# EAGLE board source_eagle (EAGLE 9.6.2)
REV: C
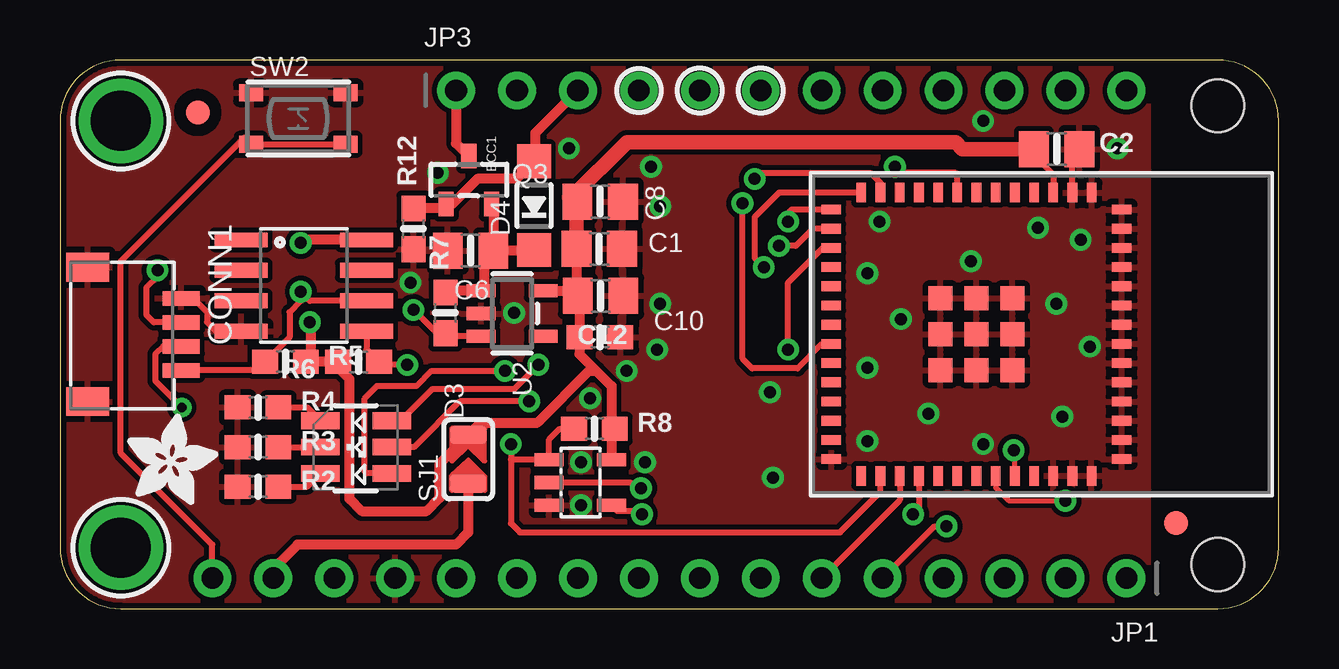
[diagram p0: board, top side]
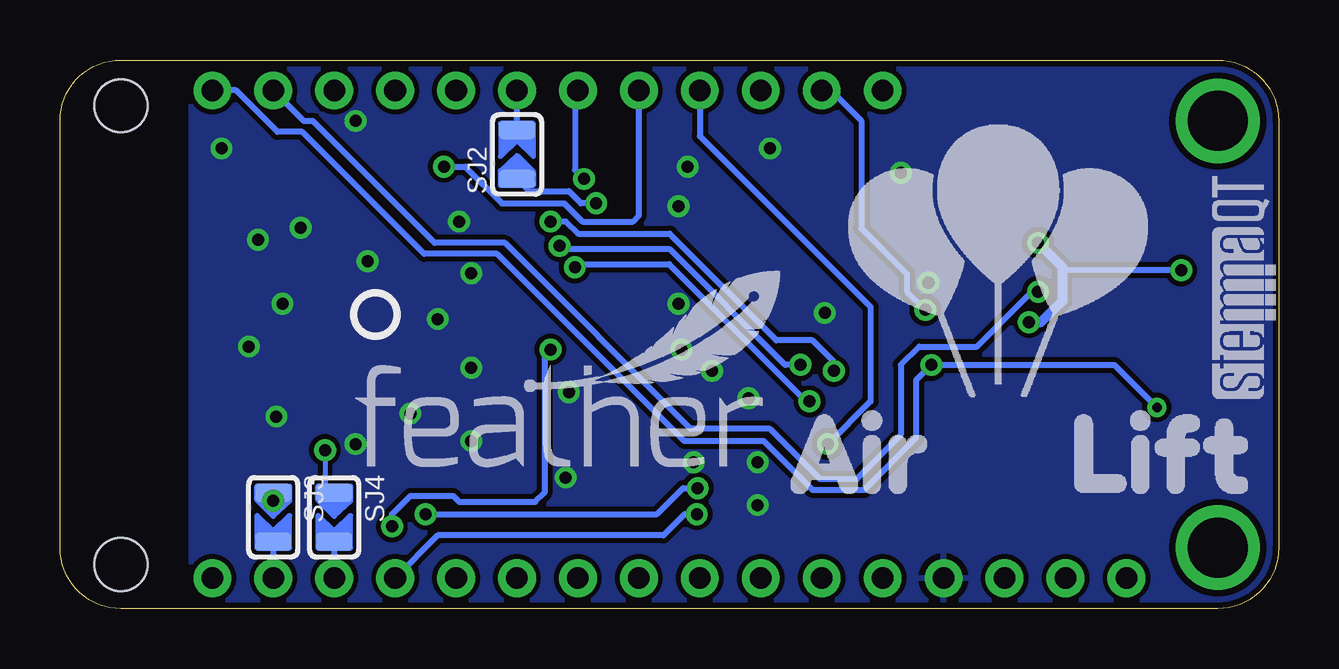
[diagram p1: board, bottom side, seen from below]

Size 50.8 x 22.86 mm. Coordinates in mm from the lower left corner, seen from the top.
Outline: 2.54,0 48.26,0 arc90 50.8,2.54 50.8,20.32 arc90 48.26,22.86 2.54,22.86 arc90 0,20.32 0,2.54 arc90 2.54,0
Copper layers (1*16): Top 0.035mm / dielectric 1.5mm / Bottom 0.035mm
Design rules "adafruit 7-7 *": minimum track width 6mil, minimum drill 15.5mil, track to track 8mil, track to pad 7mil, pad to pad 7mil, via to via 7mil, smd to smd 7mil, copper to edge 10mil, drill to drill 8mil, minimum pad ring 10mil, minimum via ring 8mil, stop-mask expansion 2mil, vias tented up to drill 20mil, thermal gap 10mil
Holes 2.2 mm at 48.26,1.84 48.26,20.95

## Footprints (pad centres in the part's own frame; a part is rotated, then mirrored left to right if it is on the bottom)
0805-NO = smd 1.24 x 1.5: 1 -0.95,0; 2 0.95,0
0603-NO = smd 1.075 x 1: 1 -0.85,0; 2 0.85,0
JST_SH4 = smd 0.6 x 1.55: 1 -1.5,2.006; 2 -0.5,2.006; 3 0.5,2.006; 4 1.5,2.006 | smd 1.2 x 1.8: MT1 -2.8,-1.894; MT2 2.8,-1.894
RGBLED_3535_PLCC6 = smd 0.7 x 1.6: 1 -1.1,-1.458; 2 0,-1.458; 3 1.1,-1.458; 4 1.1,1.508; 5 0,1.508; 6 -1.1,1.508
SOD-123 = smd 1.4 x 1.4: A 1.85,0; C -1.85,0
SOIC8 = smd 0.61 x 2.21: 1 -1.905,-2.616; 2 -0.635,-2.616; 3 0.635,-2.616; 4 1.905,-2.616; 5 1.905,2.616; 6 0.635,2.616; 7 -0.635,2.616; 8 -1.905,2.616
SOT23-5L = smd 0.55 x 1.2: 1 -0.95,-1.3; 2 0,-1.3; 3 0.95,-1.3; 4 0.95,1.3; 5 -0.95,1.3
1X16_ROUND_MIN = drill 0.9 pad 1.575: 1 -19.05,0; 2 -16.51,0; 3 -13.97,0; 4 -11.43,0; 5 -8.89,0; 6 -6.35,0; 7 -3.81,0; 8 -1.27,0; 9 1.27,0; 10 3.81,0; 11 6.35,0; 12 8.89,0; 13 11.43,0; 14 13.97,0; 15 16.51,0; 16 19.05,0
1X12_ROUND_MIN = drill 0.9 pad 1.575: 1 -13.97,0; 2 -11.43,0; 3 -8.89,0; 4 -6.35,0; 5 -3.81,0; 6 -1.27,0; 7 1.27,0; 8 3.81,0; 9 6.35,0; 10 8.89,0; 11 11.43,0; 12 13.97,0
SOT23-R = smd 0.635 x 1.016: 1 -0.95,-1; 2 0.95,-1; 3 0,1
SOLDERJUMPER_ARROW_NOPASTE = smd 0.762 x 1.524: 1 -1.016,0; 2 1.016,0
BTN_RKB2_4.6X2.8 = smd 1 x 0.7: A 1.973,1.075; A' -1.973,1.075; B 1.973,-1.075; B' -1.973,-1.075
SOT23-5 = smd 0.55 x 1.2: 1 -0.95,-1.3; 2 0,-1.3; 3 0.95,-1.3; 4 0.95,1.3; 5 -0.95,1.3
MOUNTINGHOLE_2.5_PLATED = drill 2.5 pad 3.2: P$1 0,0
FIDUCIAL_1MM = smd 1 x 1: 1 0,0
ESP32-MINI-1 = smd 0.813 x 0.406: 1 -5.9,4.9; 2 -5.9,4.1; 3 -5.9,3.3; 4 -5.9,2.5; 5 -5.9,1.7; 6 -5.9,0.9; 7 -5.9,0.1; 8 -5.9,-0.7; 9 -5.9,-1.5; 10 -5.9,-2.3; 11 -5.9,-3.1; 12 -5.9,-3.9; 13 -5.9,-4.7; 28 5.9,-4.7; 29 5.9,-3.9; 30 5.9,-3.1; 31 5.9,-2.3; 32 5.9,-1.5; 33 5.9,-0.7; 34 5.9,0.1; 35 5.9,0.9; 36 5.9,1.7; 37 5.9,2.5; 38 5.9,3.3; 39 5.9,4.1; 40 5.9,4.9 | smd 0.406 x 0.813: 14 -5.2,-5.95; 15 -4.4,-5.95; 16 -3.6,-5.95; 17 -2.8,-5.95; 18 -2,-5.95; 19 -1.2,-5.95; 20 -0.4,-5.95; 21 0.4,-5.95; 22 1.2,-5.95; 23 2,-5.95; 24 2.8,-5.95; 25 3.6,-5.95; 26 4.4,-5.95; 27 5.2,-5.95; 41 5.2,6.15; 42 4.4,6.15; 43 3.6,6.15; 44 2.8,6.15; 45 2,6.15; 46 1.2,6.15; 47 0.4,6.15; 48 -0.4,6.15; 49 -1.2,6.15; 50 -2,6.15; 51 -2.8,6.15; 52 -3.6,6.15; 53 -4.4,6.15; 54 -5.2,6.15 | smd 0.991 x 0.991: 55 -1.5,1.6; 56 0,1.6; 57 1.5,1.6; 58 -1.5,0.1; 59 0,0.1; 60 1.5,0.1; 61 -1.5,-1.4; 62 0,-1.4; 63 1.5,-1.4

## Placement (x,y rotation side)
C1  10uF  [0805-NO]  22.48,14.99 0 top
C2  10uF  [0805-NO]  41.54,19.15 0 top
C6  10uF  [0805-NO]  17.11,14.92 180 top
C8  10uF  [0805-NO]  22.51,16.96 0 top
C10  10uF  [0805-NO]  22.53,13.03 0 top
C12  0.1uF  [0603-NO]  22.5,11.3 0 top
CONN1  STEMMA_I2C_QT  [JST_SH4]  3.05,11.43 270 top
D3  RGB  [RGBLED_3535_PLCC6]  12.32,6.73 270 top
D4  MBR0520  [SOD-123]  19.76,16.79 90 top
ECC1  ATECCx08  [SOIC8]  10.16,13.46 270 top
IC2  74AHC1G125  [SOT23-5L]  21.69,5.26 270 top
JP1  [1X16_ROUND_MIN]  25.4,1.27 180 top
JP3  [1X12_ROUND_MIN]  30.48,21.59 0 top
PLABEL0  [PLABEL0]  21.72,20.07 0 top
PLABEL1  [PLABEL1]  6.35,2.92 0 top
PLABEL2  [PLABEL2]  9.02,2.79 0 top
PLABEL3  [PLABEL3]  19.18,2.79 0 top
PLABEL4  [PLABEL4]  16.76,2.79 0 top
PLABEL5  [PLABEL5]  31.75,2.92 0 top
PLABEL6  [PLABEL6]  34.29,3.3 90 top
PLABEL7  [PLABEL7]  36.83,3.05 90 top
PLABEL8  [PLABEL8]  39.37,3.3 90 top
PLABEL9  [PLABEL9]  41.91,3.05 90 top
PLABEL10  [PLABEL10]  16.51,20.07 0 top
PLABEL11  [PLABEL11]  14.1,2.79 0 top
PLABEL12  [PLABEL12]  19.05,20.07 0 top
PLABEL13  [PLABEL13]  9.96,18.11 0 top
PLABEL14  [PLABEL14]  21.69,2.74 0 top
PLABEL15  [PLABEL15]  41.85,20.32 0 top
PLABEL16  [PLABEL16]  45.28,19.68 90 top
PLABEL17  [PLABEL17]  24.23,2.77 0 top
PLABEL18  [PLABEL18]  27.81,11.3 90 top
PLABEL19  [PLABEL19]  18.8,6.22 90 top
PLABEL20  [PLABEL20]  9.7,16.59 0 top
PLABEL21  [PLABEL21]  41.91,5.59 90 bottom
PLABEL22  [PLABEL22]  39.37,5.71 90 bottom
PLABEL23  [PLABEL23]  34.29,2.29 90 bottom
PLABEL24  [PLABEL24]  36.83,2.29 90 bottom
PLABEL25  [PLABEL25]  31.75,2.29 90 bottom
PLABEL26  [PLABEL26]  15.37,2.79 0 bottom
PLABEL27  [PLABEL27]  31.62,16.89 270 bottom
PLABEL28  [PLABEL28]  24.13,20.57 270 bottom
PLABEL29  [PLABEL29]  29.21,20.57 270 bottom
PLABEL30  [PLABEL30]  26.67,20.57 270 bottom
PLABEL31  [PLABEL31]  19.05,20.57 270 bottom
PLABEL32  [PLABEL32]  21.46,20.57 270 bottom
PLABEL33  [PLABEL33]  44.45,20.45 270 bottom
PLABEL34  [PLABEL34]  41.91,20.45 270 bottom
Q3  AO3401  [SOT23-R]  17.04,17.86 0 top
R2  1K  [0603-NO]  8.26,5.08 0 top
R3  1K  [0603-NO]  8.26,6.73 0 top
R4  1K  [0603-NO]  8.26,8.38 0 top
R5  10K  [0603-NO]  9.4,10.29 0 top
R6  10K  [0603-NO]  12.45,10.29 180 top
R7  100K  [0603-NO]  16.07,12.32 90 top
R8  10K  [0603-NO]  22.28,7.49 0 top
R12  100K  [0603-NO]  14.73,15.82 90 top
SJ1  JUMPER  [SOLDERJUMPER_ARROW_NOPASTE]  17.02,6.22 90 top
SJ2  [SOLDERJUMPER_ARROW_NOPASTE]  31.75,18.92 90 bottom
SJ3  [SOLDERJUMPER_ARROW_NOPASTE]  41.91,3.81 270 bottom
SJ4  [SOLDERJUMPER_ARROW_NOPASTE]  39.37,3.81 270 bottom
SW2  RKB2  [BTN_RKB2_4.6X2.8]  9.93,20.42 0 top
U2  RT9080-3.3  [SOT23-5]  18.85,12.29 270 top
U$6  [AIRLIFT]  20.32,3.43 0 bottom
U$7  [FEATHERLOGO_MED]  38.61,5.84 0 bottom
U$12  [STEMMAQT]  0.13,8.76 90 bottom
U$13  [PCBFEAT-REV-040]  37.66,12.26 0 bottom
U$15  [ADAFRUIT_3.5MM]  2.79,4.32 0 top
U$31  MOUNTINGHOLE2.5  [MOUNTINGHOLE_2.5_PLATED]  2.54,20.32 270 top
U$32  MOUNTINGHOLE2.5  [MOUNTINGHOLE_2.5_PLATED]  2.54,2.54 270 top
U$34  FIDUCIAL_1MM  [FIDUCIAL_1MM]  5.74,20.68 270 top
U$35  FIDUCIAL_1MM  [FIDUCIAL_1MM]  46.53,3.56 270 top
X1  ESP32-MINI-1  [ESP32-MINI-1]  38.1,11.43 270 top

## Library data of the parts
C1 C2 C6 C10 C12 D3 D4 JP1 JP3 R2-R8 R12 U$13 U$15 = microbuilder
C8 = microbuilder; COMPANY: ADAFRUIT INDUSTRIES; DRAWN: KTOWN; REV: C
CONN1 = adafruit_electromech; LCSC: C2845363
ECC1 = cryptotronix
IC2 = adafruit; ROT: 270
PLABEL0 PLABEL1-PLABEL34 = pinguin
Q3 = microbuilder; ROT: 270
SJ1-SJ4 U$34 U$35 = microbuilder; BOM: EXCLUDE
SW2 = adafruit_electromech
U2 = adafruit_power; JLC_ROTATION: 0
U$6 U$7 U$12 = silks
U$31 U$32 = adafruit_electromech; BOM: EXCLUDE
X1 = adafruit_wireless

## Nets
3.3V: C1.1 C2.1 C8.1 C10.1 C12.1 CONN1.2 ECC1.8 IC2.5 R5.2 R6.2 R8.2 SJ1.2 U2.5 X1.3
A0: JP1.12
A1: JP1.11
A2: JP1.10
A3: JP1.9
A4: JP1.8
A5: JP1.7
BLUE: D3.6 X1.15
D5: JP3.10
D6: JP3.9
D9: JP3.8
EN: JP3.2 R7.1 U2.3
ESP_BUSY: JP3.6 X1.12
ESP_CS: IC2.1 JP3.4 R8.1 X1.29
ESP_GPIO0: SJ2.1 X1.21
ESP_MISO: IC2.2 X1.31
ESP_RESET: JP3.5 X1.8
ESP_RX: SJ3.1 X1.35
ESP_TX: SJ4.1 X1.36
GND: C1.2 C2.2 C6.2 C8.2 C10.2 C12.2 CONN1.1 CONN1.MT1 CONN1.MT2 ECC1.4 IC2.3 JP1.13 R2.1 R3.1 R4.1 R12.1 SW2.A SW2.A' U2.2 X1.1 X1.2 X1.27 X1.38 X1.39 X1.40 X1.41 X1.42 X1.43 X1.44 X1.45 X1.46 X1.47 X1.48 X1.49 X1.50 X1.51 X1.52 X1.53 X1.54 X1.55 X1.56 X1.57 X1.58 X1.59 X1.60 X1.61 X1.62 X1.63
GREEN: D3.5 X1.13
MISO: IC2.4 JP1.4
MOSI: JP1.5 X1.16
N$1: JP1.15 SJ1.1
N$2: D3.3 R2.2
N$3: D3.2 R3.2
N$4: D3.1 R4.2
N$5: JP3.7 SJ2.2
N$6: JP1.2 SJ3.2
N$7: C6.1 D4.C Q3.2 R7.2 U2.1
N$8: JP1.3 SJ4.2
NC: JP1.1
RED: D3.4 X1.14
RESET: JP1.16 SW2.B SW2.B'
SCK: JP1.6 X1.30
SCL: CONN1.4 ECC1.6 JP3.11 R5.1
SDA: CONN1.3 ECC1.5 JP3.12 R6.1
VBAT: JP3.1 Q3.3
VBUS: D4.A JP3.3 Q3.1 R12.2

## Tracks (layer width: path | path; a pad name or v marks a point on that pad's centre or on a via)
3.3V  (via drill 0.5)
  Top 0.254: R6.2 R5.2 | C2.1 40.59,18.9 41.4,18.09 X1.3 | R8.2 22.99,7.49 | CONN1.2 3.91,11.93 3.6,12.24 3.6,13.38 4.06,13.84 v4.06,14.1
  Top 0.406: 21.53,16.95 21.55,16.97 | U2.5 21.37,13.24 C10.1 | C1.1 21.53,13.08 C10.1 | C10.1 21.65,12.96 C12.1 21.65,10.6 22.35,9.91 | 22.35,9.91 22.06,9.91 19.9,7.75 17.53,7.75 SJ1.2 15.82,6.04 15.82,4.62 15.27,4.06 12.57,4.06 12.06,4.57 12.06,9.56 11.6,10.03 R6.2 10.45,10.29 10.45,11.9 v10.41,11.94 | ECC1.8 10.16,15.37 v10.03,15.24 | 22.35,9.91 22.99,9.27 22.99,7.49 IC2.5
  Top 0.61: C2.1 37.62,19.15 37.34,19.43 23.63,19.43 21.33,17.13 | C1.1 21.53,16.95
  Top 0.813: 21.33,17.13 21.55,16.97 C8.1
  Bottom 0.254: v4.06,14.1 9.02,14.1
  Bottom 0.406: v10.03,15.24 9.02,14.22 9.02,14.1 9.02,12.83 9.91,11.94 v10.41,11.94
BLUE  (via drill 0.5)
  Top 0.254: v19.94,10.16 18.92,9.14 15.52,9.14 14.21,7.83 D3.6 | X1.15 31.39,15.83 30.67,15.11 v29.97,15.11
  Bottom 0.254: v19.94,10.16 20.57,10.16 25.4,14.99 29.84,14.99 v29.97,15.11
EN  (via drill 0.5)
  Top 0.254: U2.3 16.19,11.34 R7.1 15.71,11.47 v14.73,12.45
  Bottom 0.254: JP3.2 18.67,21.59 17.4,20.32 17.4,15.85 15.49,13.94 15.49,13.21 v14.73,12.45
ESP_BUSY  (via drill 0.5)
  Top 0.254: v28.96,17.9 28.96,18.16 33.78,18.16 34.2,17.74 X1.12
  Bottom 0.254: JP3.6 29.34,21.46 29.34,18.28 v28.96,17.9
ESP_CS  (via drill 0.5)
  Top 0.254: v18.8,6.86 18.8,6.22 | 18.8,6.22 18.8,3.56 19.18,3.17 32.51,3.17 34.2,4.86 X1.29 | 18.8,6.22 18.81,6.21 IC2.1 20.39,7.06 20.83,7.49 R8.1
  Bottom 0.254: JP3.4 24.13,19.68 17.02,12.57 17.02,8.64 v18.8,6.86
ESP_GPIO0  (via drill 0.5)
  Top 0.254: X1.21 31.77,11.03 30.75,10.01 28.85,10.01 28.45,10.41 v28.45,16.89
  Bottom 0.254: v28.45,16.89 29.08,16.89 29.59,17.4 31.24,17.4 SJ2.1
ESP_MISO  (via drill 0.5)
  Top 0.254: IC2.2 23.78,5.26 24.17,4.87 24.17,4.97 v24.22,5.02 | X1.31 35.8,4.18 v35.56,3.94
  Bottom 0.254: v35.56,3.94 25.91,3.94 24.82,5.02 v24.22,5.02
ESP_RESET  (via drill 0.5)
  Top 0.254: X1.8 37.4,18.1 37.34,18.16 35.05,18.16 v34.8,18.41
  Bottom 0.254: v34.8,18.41 33.91,18.41 32.38,16.89 29.79,16.89 29.03,16.13 26.92,16.13 26.67,16.38 JP3.5
ESP_RX  (via drill 0.5)
  Top 0.203: X1.35 39,5.05 39.55,4.49 v41.91,4.49
  Bottom 0.203: v41.91,4.49 SJ3.1
ESP_TX  (via drill 0.5)
  Top 0.203: X1.36 39.8,6.55 v39.75,6.6
  Bottom 0.203: v39.75,6.6 39.75,5.21 SJ4.1
GND  (via drill 0.5)
  Top 0.254: X1.2 42.2,18.86 C2.2 | CONN1.1 5.56,12.93 6.13,12.36 6.13,11.94 6.51,11.56 ECC1.4
  other vias: 18.92,12.32 14.61,13.59 23.62,9.91 21.21,19.18 21.72,4.32 21.72,6.1 22.1,8.76 33.66,6.99 29.72,5.46 29.59,9.02 33.66,10.03 33.66,13.97 37.97,14.48 36.2,8.13 41.78,8 42.93,10.92 41.53,12.7 42.55,15.37 34.16,16.13 40.77,15.88 35.05,12.06 38.48,6.86 24.64,18.41 25.02,16.76 25.02,12.7 24.89,10.79 44.07,19.18 24.38,6.1 15.75,18.16 38.48,20.32
  pour Top: 0,22.86 45.34,22.86 45.34,0 0,0
  pour Bottom: 0,22.86 45.34,22.86 45.34,0 0,0
GREEN  (via drill 0.5)
  Top 0.254: D3.5 14.76,6.73 16.66,8.64 v19.56,8.64 | X1.13 29.97,17.33 28.96,16.31 28.96,14.61 v29.34,14.22
  Bottom 0.254: v29.34,14.22 29.21,14.35 25.41,14.35 19.7,8.64 v19.56,8.64
MISO  (via drill 0.5)
  Top 0.254: v24.26,3.94 24.13,4.06 23.23,4.06 IC2.4
  Bottom 0.254: v24.26,3.94 24.77,3.94 25.65,3.05 35.05,3.05 JP1.4
MOSI  (via drill 0.5)
  Top 0.254: JP1.5 36.45,3.43 v36.96,3.43 | v30.35,10.79 30.35,13.59 31.79,15.03 X1.16
  Bottom 0.254: v36.96,3.43 36.96,3.94 36.2,4.7 34.42,4.7 34.16,4.45 30.99,4.45 30.61,4.83 30.61,10.54 v30.35,10.79
N$1
  Top 0.406: SJ1.1 17.02,3.17 16.51,2.67 9.91,2.67 8.89,1.65 JP1.15
N$2
  Top 0.254: R2.2 10.31,5.08 D3.3
N$3
  Top 0.254: R3.2 D3.2
N$4
  Top 0.254: R4.2 10.31,8.38 D3.1
N$5
  Bottom 0.254: SJ2.2 JP3.7
N$6
  Bottom 0.254: SJ3.2 JP1.2
N$7
  Top 0.406: D4.C 19.74,14.92 C6.1 | Q3.2 18.07,16.79 C6.1 | R7.2 16.14,13.24 U2.1 17.68,13.24 17.68,14.54 C6.1
N$8
  Bottom 0.254: SJ4.2 JP1.3
RED  (via drill 0.5)
  Top 0.254: D3.4 12.75,5.63 12.76,5.65 12.7,5.71 12.7,8.76 13.21,9.27 14.86,9.27 15.49,9.91 v18.54,9.91 | X1.14 30.5,16.63 30.35,16.48 v30.35,16.13
  Bottom 0.254: v18.54,9.91 18.54,10.29 19.43,11.18 20.94,11.18 25.39,15.62 29.21,15.62 29.72,16.13 v30.35,16.13
RESET
  Top 0.254: SW2.B SW2.B' 7.68,19.62 2.54,14.48 2.54,6.48 6.35,2.67 JP1.16
SCK
  Top 0.254: X1.30 35,4.52 JP1.6
SCL  (via drill 0.5)
  Top 0.254: ECC1.6 10.41,12.83 v10.03,13.21 10.03,12.83 9.56,12.36 9.56,11.3 R5.1 8.19,9.93 CONN1.4
  Bottom 0.254: v10.03,13.21 10.29,13.21 12.57,10.92 14.99,10.92 15.75,10.16 15.75,7.24 17.58,5.41 19.13,5.41 21.21,7.49 24.51,7.49 32.26,15.24 35.18,15.24 40.26,20.32 40.64,20.32 JP3.11
SDA  (via drill 0.39, 0.5)
  Top 0.254: v14.48,10.16 13.43,10.16 R6.1 12.78,10.81 ECC1.5 | CONN1.3 4.29,10.93 3.97,10.61 3.97,9.49 v5.08,8.38
  Bottom 0.254: JP3.12 43.45,21.59 41.73,19.86 40.7,19.86 35.62,14.78 32.57,14.78 24.78,6.99 21.46,6.99 19.43,4.95 17.27,4.95 15.11,7.11 15.11,9.52 v14.48,10.16 v14.47,10.16 6.86,10.16 v5.08,8.38
VBAT
  Top 0.406: JP3.1 16.51,19.39 Q3.3
VBUS
  Top 0.254: D4.A
  Top 0.406: JP3.3 19.81,19.81 19.81,18.69 D4.A 19.03,17.91 17.4,17.91 16.35,16.86 Q3.1 15.91,16.67 R12.2

## Text on the board
Pinguin_tBackup: BAT | EN | USB | SCL | SDA | RESET | ATECCx08 | AirLift Wifi / FeatherWing / Co-Processor | 3.3V | RST | 3V | GND | A0 | A1 | A2 | A3 | SCK | MO | MI | RX | TX
Pinguin_bBackup: EN | VUSB | ESPCS | ESPRST | ESPBUSY | SCL | SDA | ESPGPIO0 | ESPTX | ESPRX | GND | SCK | MOSI | MISO